# Altium PCB pcb.PcbDoc (part 2 of 2)
Units mil, origin at the board's own origin, x right, y up, seen from the top; angles counter-clockwise.
Board outline 2362.2 x 2507.87 mil, 4 copper layers (Top Layer, Internal Plane 1, MidLayer1, Bottom Layer); 87 components, 150 nets, 729 pads, 361 vias.
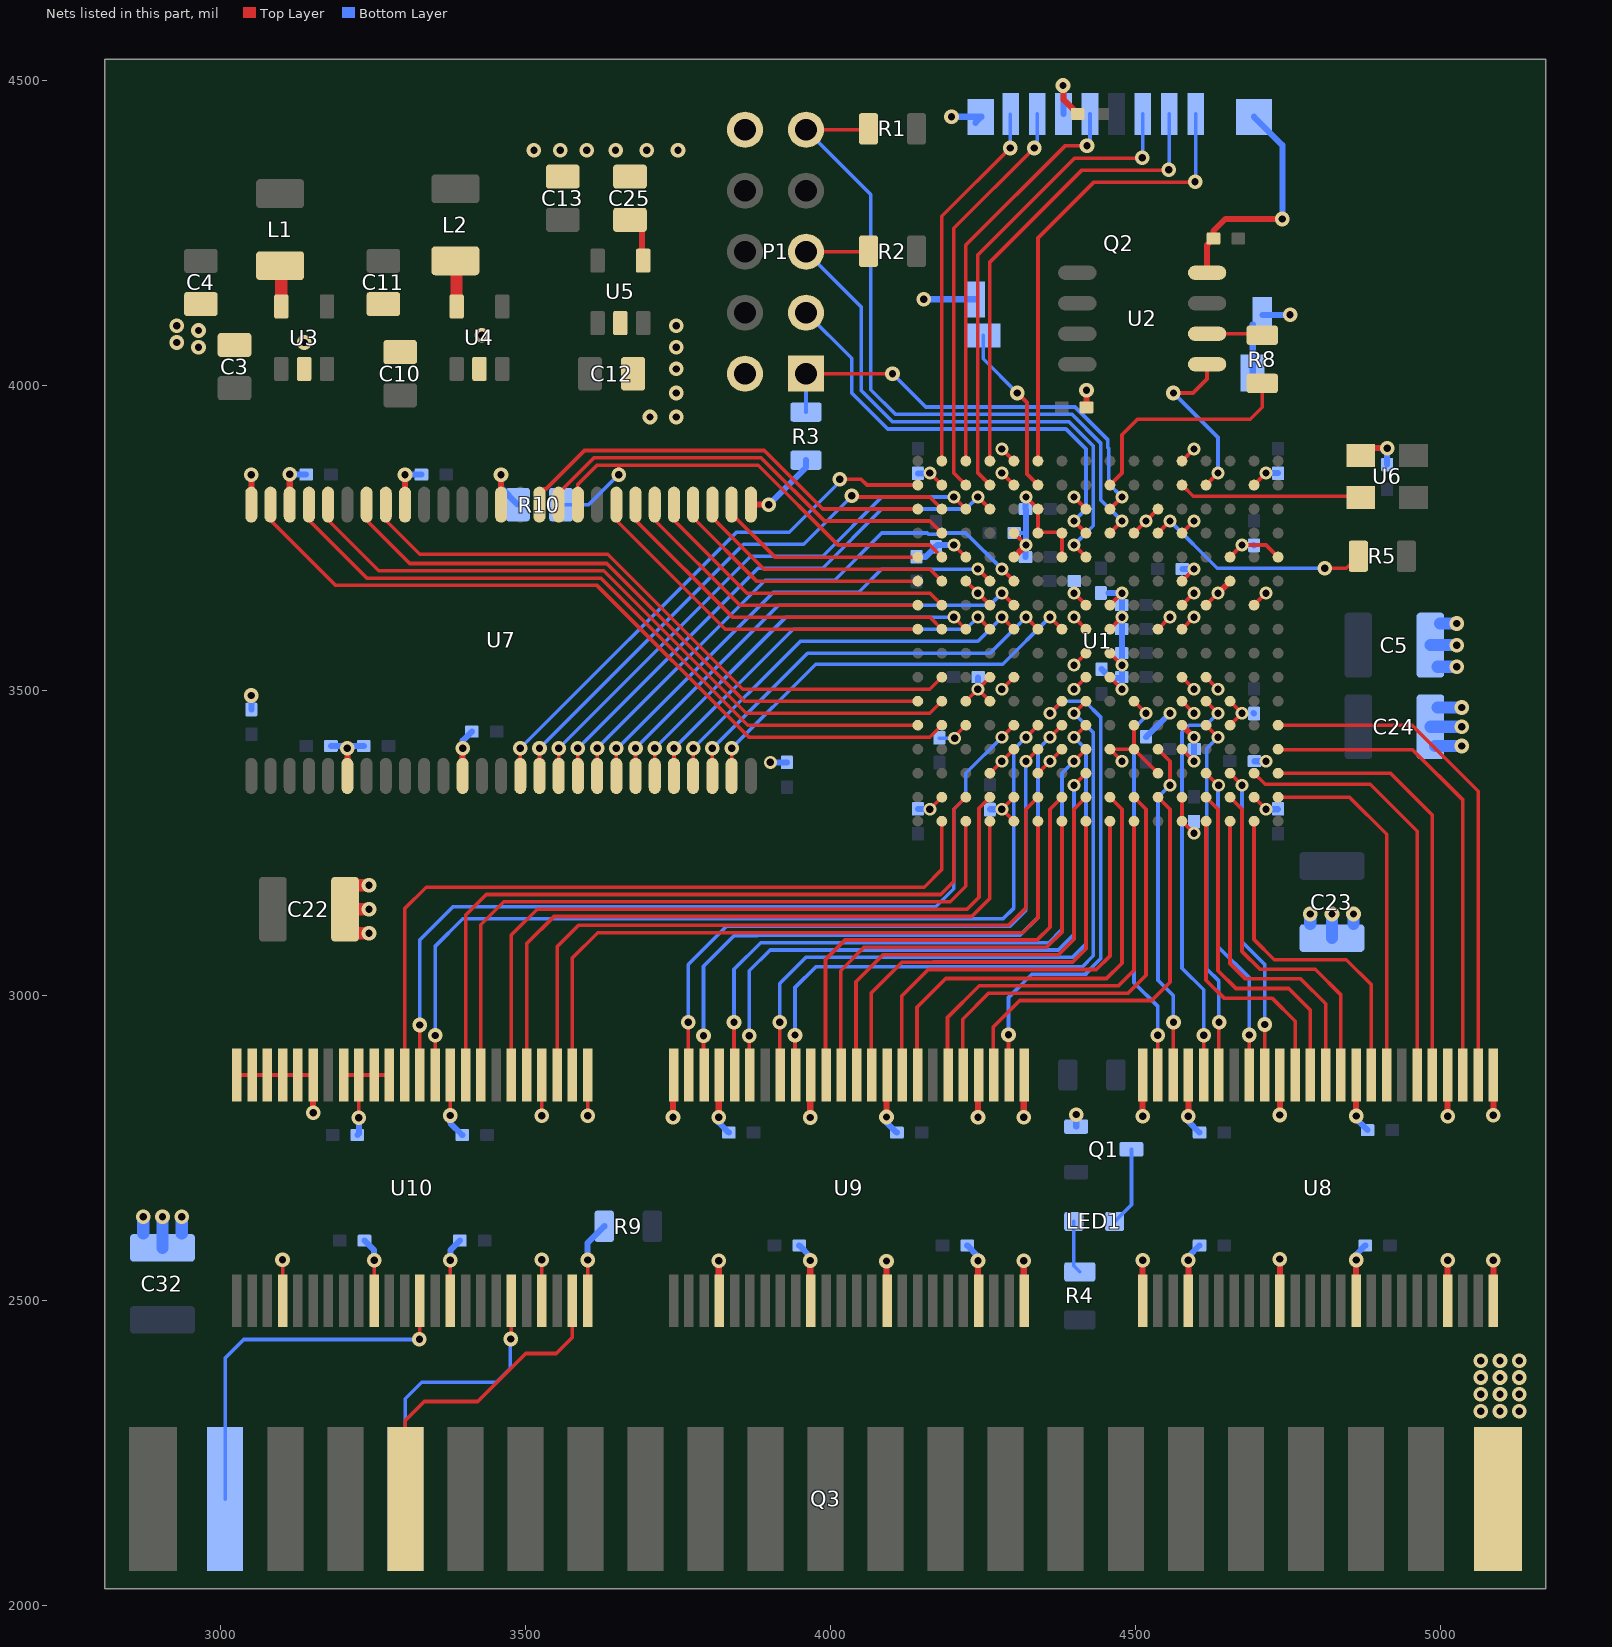
[diagram p4: the nets of this part, all layers, seen from the top]

## Via types
v1: diameter 24, hole 12, Top Layer to Bottom Layer, 242 vias
v2: diameter 21, hole 12, Top Layer to Bottom Layer, 116 vias
v3: diameter 22, hole 12, Top Layer to Bottom Layer, 2 vias
v4: diameter 23, hole 12, Top Layer to Bottom Layer, 1 vias

## Nets (pads, with @x,y where several pads share a name; then routed paths per layer and width w, separated by ;. In a path a pad name is that pad's centre, name@x,y a point inside that pad or via, vN(x,y) a via of type N, cw(c..) or ccw(c..) an arc to the next point about the centre after c; other vN are vias at no path point) (continued)
DQ11: U1.R10 U7.47 | length 1060.1
  Top Layer w6: U7.47@3271.65,3805.12 3271.65,3779.53 3327.34,3723.84 3635.73,3723.84 3857.01,3502.56 4163.62,3502.56 U1.R10@4183.31,3522.24
DQ12: U1.T11 U7.48 | length 1052.2
  Top Layer w6: U7.48@3240.16,3805.12 3240.16,3779.53 3311.02,3708.66 3633.94,3708.66 3859.73,3482.87 U1.T11@4143.94,3482.87
DQ13: U1.R11 U7.50 | length 1170.9
  Top Layer w6: U7.50@3177.17,3805.12 3177.17,3779.53 3260.03,3696.66 3628.97,3696.66 3862.44,3463.19 4163.62,3463.19 U1.R11@4183.31,3482.87
DQ14: U1.T12 U7.51 | length 1163
  Top Layer w6: U7.51@3145.67,3805.12 3145.67,3779.53 3240.54,3684.66 3624,3684.66 3865.16,3443.5 U1.T12@4143.94,3443.5
DQ15: U1.R12 U7.53 | length 1281.7
  Top Layer w6: U7.53@3082.68,3805.12 3082.68,3779.53 3189.54,3672.66 3618.11,3672.66 3866.95,3423.82 4163.62,3423.82 U1.R12@4183.31,3443.5
FA0: U1.J15 U9.36 | length 779.9
  Top Layer w6: U9.36@4042.5,2870.04 4042.5,3022.82 4086.61,3066.93 4164.13,3066.93 4164.51,3067.31 4374.39,3067.31 4399.84,3092.76 4399.84,3305.71 U1.J15@4419.53,3325.39
FA1: U1.H16 U9.33 | length 718.8
  Top Layer w6: U9.33@4117.5,2870.04 4117.5,2999.39 4161.04,3042.93 4436.63,3042.93 4458.9,3065.2 U1.H16@4458.9,3286.02
FA2: U1.G16 U9.30 | length 676.4
  Top Layer w6: U9.30@4192.5,2870.04 4192.5,2964.15 4244.47,3016.13 4472.82,3016.13 4498.27,3041.58 U1.G16@4498.27,3286.02
FA3: U1.F15 U9.27 | length 710.4
  Top Layer w6: U9.27@4267.5,2870.04 4267.5,2948.6 4311.02,2992.13 4527.56,2992.13 4557.32,3021.89 4557.32,3305.71 U1.F15@4537.64,3325.39
FA4: U1.G11 U8.47 | length 645.4
  Top Layer w6: U1.G11@4498.27,3482.87 v2(4517.95,3463.19) ; U8.47@4537.5,2870.04 v1(4537.5,2935.14)
  Bottom Layer w6: v2(4517.95,3463.19) 4517.95,3458.01 4498.27,3438.32 4498.27,3021.42 4537.5,2982.19 v1(4537.5,2935.14)
FA5: U1.D11 U8.44 | length 676.3
  Top Layer w6: U8.44@4612.5,2870.04 v1(4612.5,2935.33) ; U1.D11@4616.38,3482.87 v2(4636.06,3463.19)
  Bottom Layer w6: v1(4612.5,2935.33) 4612.5,3009.55 4577.01,3045.04 4577.01,3431.71 4588.62,3443.32 4616.19,3443.32 v2(4636.06,3463.19)
FA6: U1.D14 U8.41 | length 524.2
  Top Layer w6: U1.D14@4616.38,3364.76 v2@4636.06,3345.08 ; U8.41@4687.5,2870.04 v1(4687.5,2935.53)
  Bottom Layer w6: v2@4636.06,3345.08 4636.06,3080.47 4687.5,3029.04 v1(4687.5,2935.53)
  other v2: 4637.06,3345.08
FA7: U1.D16 U8.38 | length 522.6
  Top Layer w6: U1.D16@4616.38,3286.02 4616.38,3025.35 4645.67,2996.06 4724.41,2996.06 4762.5,2957.97 U8.38@4762.5,2870.04
FA8: U1.C16 U8.36 | length 534
  Top Layer w6: U1.C16@4655.75,3286.02 4655.75,3052.91 4681.1,3027.56 4771.65,3027.56 4812.5,2986.71 U8.36@4812.5,2870.04
FA9: U1.B16 U8.33 | length 564.9
  Top Layer w6: U1.B16@4695.12,3286.02 4695.12,3092.28 4728.35,3059.06 4846.46,3059.06 4887.5,3018.01 U8.33@4887.5,2870.04
FA10: U1.B14 U8.30 | length 706.5
  Top Layer w6: U1.B14@4695.12,3364.76 4713.43,3346.46 4885.83,3346.46 4962.5,3269.78 U8.30@4962.5,2870.04
FA11: U1.A13 U8.27 | length 788.3
  Top Layer w6: U1.A13@4734.49,3404.13 4735.35,3403.28 4954.99,3403.28 5037.5,3320.77 U8.27@5037.5,2870.04
FA12: U1.A12 U8.26 | length 838
  Top Layer w6: U1.A12@4734.49,3443.5 4954.13,3443.5 5062.5,3335.14 U8.26@5062.5,2870.04
FA13: U1.A14 U8.29 | length 707.4
  Top Layer w6: U1.A14@4734.49,3364.76 4918.7,3364.76 4987.5,3295.96 U8.29@4987.5,2870.04
FA14: U1.A15 U8.32 | length 597.8
  Top Layer w6: U1.A15@4734.49,3325.39 4851.77,3325.39 4912.5,3264.67 U8.32@4912.5,2870.04
FA15: U1.C15 U8.35 | length 583.7
  Top Layer w6: U1.C15@4655.75,3325.39 4675.43,3305.71 4675.43,3072.6 4704.72,3043.31 4795.28,3043.31 4837.5,3001.08 U8.35@4837.5,2870.04
FBA0: U1.D15 U8.37 | length 577
  Top Layer w6: U1.D15@4616.38,3325.39 4636.06,3305.71 4636.06,3041.1 4665.35,3011.81 4751.97,3011.81 4787.5,2976.28 U8.37@4787.5,2870.04
FBA1: U1.C14 U8.40 | length 518.2
  Top Layer w6: U1.C14@4655.75,3364.76 v2(4675.43,3345.08) ; U8.40@4712.5,2870.04 v1@4712.5,2952.66
  Bottom Layer w6: v2(4675.43,3345.08) 4675.43,3088.35 4712.5,3051.28 4712.5,2952.85 v1(4712.6,2952.76)
FBA2: U1.D12 U8.43 | length 597.4
  Top Layer w6: U1.D12@4616.38,3443.5 v2(4636.06,3423.82) ; U8.43@4637.5,2870.04 4637.5,2956.4 v1(4637.8,2956.69)
  Bottom Layer w6: v2(4636.06,3423.82) 4617.5,3405.26 4617.5,3043.91 4637.5,3023.92 v1@4637.5,2956.99
FBA3: U1.F13 U8.46 | length 559.7
  Top Layer w6: U1.F13@4537.64,3404.13 4557.32,3384.45 v2(4557.32,3345.08) ; U8.46@4562.5,2870.04 v1@4562.5,2956.2
  Bottom Layer w6: v2(4557.32,3345.08) 4537.64,3325.39 4537.64,3025.35 4562.5,3000.49 v1@4562.5,2957.18
  other v1: 4562.99,2956.69
FBA4: U1.K11 U9.26 | length 831.4
  Top Layer w6: U9.26@4292.5,2870.04 v1(4292.5,2935.85) ; v2(4360.47,3463.19) U1.K11@4380.16,3482.87
  Bottom Layer w6: v1(4292.5,2935.85) 4292.5,2997.22 4330.52,3035.24 4419.53,3035.24 4419.53,3036.42 4443.53,3060.42 4443.53,3456.92 4417.58,3482.87 4380.16,3482.87 v2(4360.47,3463.19)
FBA5: U1.G15 U9.29 | length 721.7
  Top Layer w6: U9.29@4217.5,2870.04 4217.5,2961.59 4259.84,3003.94 4305.86,3003.94 4306.05,3004.13 4488.38,3004.13 4517.95,3033.7 4517.95,3305.71 U1.G15@4498.27,3325.39
FBA6: U1.H15 U9.32 | length 757.2
  Top Layer w6: U9.32@4142.5,2870.04 4142.5,2981.08 4189.54,3028.13 4453.32,3028.13 4478.58,3053.39 4478.58,3305.71 U1.H15@4458.9,3325.39
FBA7: U1.J16 U9.35 | length 725.5
  Top Layer w6: U9.35@4067.5,2870.04 4067.5,3004.51 4117.92,3054.93 4169.1,3054.93 4169.48,3055.31 4397.83,3055.31 4419.53,3077.01 U1.J16@4419.53,3286.02
FCART: U1.L15 U10.27 | length 1194.7
  Top Layer w6: U10.27@3552.5,2870.04 3552.5,3080.06 3587.75,3115.31 4292.47,3115.31 4321.1,3143.94 4321.1,3305.71 U1.L15@4340.79,3325.39
FCIC1: U1.R16 U10.37 | length 1259.1
  Top Layer w6: U10.37@3302.5,2870.04 3302.5,3142.59 3337.83,3177.92 4154.3,3177.92 4183.31,3206.93 U1.R16@4183.31,3286.02
FCIC2: U1.N16 U10.29 | length 1131.9
  Top Layer w6: U10.29@3502.5,2870.04 3502.5,3085.18 3547.24,3129.92 4232.28,3129.92 4262.05,3159.69 4262.05,3246.65 U1.N16@4262.05,3286.02
FCIC6: U1.P16 U10.32 | length 1174.3
  Top Layer w6: U10.32@3427.5,2870.04 3427.5,3116.48 3464.95,3153.92 4197.23,3153.92 4222.68,3179.37 U1.P16@4222.68,3286.02
FCIC7: U1.P15 U10.33 | length 1231.6
  Top Layer w6: U10.33@3402.5,2870.04 3402.5,3131.98 3436.44,3165.92 4181.67,3165.92 4202.99,3187.24 4202.99,3305.71 U1.P15@4222.68,3325.39
FCPUCLK: U1.L12 U10.35 | length 1501.7
  Top Layer w6: U10.35@3352.5,2870.04 v1(3352.5,2934.9) ; v2(4321.1,3423.82) U1.L12@4340.79,3443.5
  Bottom Layer w6: v1(3352.5,2934.9) 3352.5,3080.85 3397.83,3126.17 4283.65,3126.17 4301.42,3143.94 4301.42,3404.13 v2(4321.1,3423.82)
FD0: U1.K15 U9.38 | length 800.4
  Top Layer w6: U9.38@3992.5,2870.04 3992.5,3059.43 4024.38,3091.31 4339.34,3091.31 4360.47,3112.44 4360.47,3305.71 U1.K15@4380.16,3325.39
FD1: U1.J12 U9.41 | length 1053.4
  Top Layer w6: U9.41@3917.5,2870.04 v1@3917.5,2956.52 ; v2(4399.84,3423.82) U1.J12@4419.53,3443.5
  Bottom Layer w6: v1@3917.5,2956.87 3917.5,3019.86 3960.63,3062.99 4397.64,3062.99 4419.53,3084.88 4419.53,3404.13 v2(4399.84,3423.82)
  other v1: 3917.32,2956.69
FD2: U1.J13 U9.44 | length 1049.8
  Top Layer w6: U9.44@3842.5,2870.04 v1(3842.52,2956.69) ; v2(4399.84,3384.45) U1.J13@4419.53,3404.13
  Bottom Layer w6: v1(3842.52,2956.69) 3842.52,3043.27 ; 3842.5,3043.29 3886.2,3086.99 4358.65,3086.99 4380.16,3108.5 4380.16,3364.76 v2(4399.84,3384.45)
FD3: U1.L13 U9.47 | length 1043.3
  Top Layer w6: U9.47@3767.5,2870.04 v1@3767.5,2956.48 ; v2(4321.1,3384.45) U1.L13@4340.79,3404.13
  Bottom Layer w6: v1@3767.5,2956.91 3767.5,3050.96 3830.71,3114.17 4295.28,3114.17 4321.1,3140 v2(4321.1,3384.45)
  other v1: 3767.72,2956.69
FD4: U1.K16 U9.37 | length 741.5
  Top Layer w6: U9.37@4017.5,2870.04 4017.5,3041.12 4055.69,3079.31 4354.9,3079.31 4380.16,3104.57 4380.16,3246.65 U1.K16@4380.16,3286.02
FD5: U1.J11 U9.40 | length 1092.7
  Top Layer w6: U9.40@3942.5,2870.04 v1(3942.5,2935.45) ; v2(4399.84,3463.19) U1.J11@4419.53,3482.87
  Bottom Layer w6: v1(3942.5,2935.45) 3942.5,3013.37 3976.38,3047.24 4413.39,3047.24 4431.53,3065.39 4431.53,3431.5 v2(4399.84,3463.19)
FD6: U1.J14 U9.43 | length 1000.1
  Top Layer w6: U9.43@3867.5,2870.04 v1(3867.5,2934.43) ; v2(4399.84,3345.08) U1.J14@4419.53,3364.76
  Bottom Layer w6: v1(3867.5,2934.43) 3867.5,3040.73 3901.76,3074.99 4374.2,3074.99 4399.84,3100.63 v2(4399.84,3345.08)
FD7: U1.K12 U9.46 | length 1091.3
  Top Layer w6: U9.46@3792.5,2870.04 v1(3792.5,2934.23) ; v2(4360.47,3423.82) U1.K12@4380.16,3443.5
  Bottom Layer w6: v1(3792.5,2934.23) 3792.5,3048.41 3842.52,3098.43 3880.67,3098.43 3881.23,3098.99 4311.59,3098.99 4340.79,3128.19 4340.79,3404.13 v2(4360.47,3423.82)
FLASHCE: U1.D2 U2.1 | length 278.2
  Top Layer w6: v1(4562.94,3988.15) 4595.18,3988.15 4618.11,4011.08 U2.1@4618.11,4035.24 ; U1.D2@4616.38,3837.21 v2(4636.06,3856.89)
  Bottom Layer w6: v1(4562.94,3988.15) 4636.06,3915.03 v2(4636.06,3856.89)
FLASHDATA: R8.2 U1.H2 | length 378.6
  Top Layer w6: U1.H2@4458.9,3837.21 4478.58,3856.89 4478.58,3919.53 4503.94,3944.88 4688.98,3944.88 4708.66,3964.57 R8.2@4708.66,4003.94
FRD: U1.N15 U10.30 | length 1193.1
  Top Layer w6: U10.30@3477.5,2870.04 3477.5,3099.55 3519.87,3141.92 4224.6,3141.92 4244.09,3161.42 4244.09,3307.44 U1.N15@4262.05,3325.39
FRESET: U1.M12 U10.36 | length 1440.4
  Top Layer w6: U10.36@3327.5,2870.04 v1(3327.5,2952.03) ; v2(4281.73,3423.82) U1.M12@4301.42,3443.5
  Bottom Layer w6: v1(3327.5,2952.03) 3327.5,3091.28 3381.89,3145.67 4173.23,3145.67 4202.99,3175.43 4202.99,3305.71 4222.68,3325.39 4222.68,3364.76 v2(4281.73,3423.82)
FWR: U1.L16 U10.26 | length 1140.4
  Top Layer w6: U10.26@3577.5,2870.04 3577.5,3061.75 3619.06,3103.31 4315.91,3103.31 4340.79,3128.19 4340.79,3246.65 U1.L16@4340.79,3286.02
GND: C1.1 C2.1 C3.1 C4.1 C5.2 C6.1 C7.1 C8.1 C9.1 C10.1 C11.1 C12.1 C13.1 C14.1 C15.1 C16.1 C17.1 C18.1 C19.1 C20.1 C21.1 C22.2 C23.2 C24.2 C25.1 C26.1 C27.1 C28.1 C29.1 C30.1 C31.1 C32.2 C34.1 C35.1 C36.1 C37.1 C38.1 C39.1 C40.1 C41.1 C42.1 C45.1 C46.1 C47.1 C48.1 C49.1 C50.1 C51.1 C52.1 C53.1 C54.1 C55.1 C56.1 C57.1 C58.1 C59.1 C60.1 C61.1 C62.1 C63.1 C64.1 P1.2 P1.10 Q1.2 Q2.6 Q2.CD2 Q2.GND Q3.5 Q3.36 R3.2 R9.1 R10.1 U1.A5 U1.B2 U1.B7 U1.B15 U1.C5 U1.C6 U1.C11 U1.C12 U1.D7 U1.D10 U1.E1 U1.E4 U1.E6 U1.E7 U1.E8 U1.E10 U1.E11 U1.E12 U1.E13 U1.E15 U1.E16 U1.F3 U1.F8 U1.F14 U1.G4 U1.G12 U1.G13 U1.H7 U1.H8 U1.H9 U1.H10 U1.H13 U1.J3 U1.J7 U1.J8 U1.J9 U1.J10 U1.K4 U1.K5 U1.K13 U1.L3 U1.L4 U1.L14 U1.M1 U1.M2 U1.M4 U1.M5 U1.M10 U1.M13 U1.M15 U1.M16 U1.N7 U1.N10 U1.N11 U1.N14 U1.P5 U1.P6 U1.P11 U1.P12 U1.R2 U1.R15 U2.4 U3.2 U4.2 U5.2 U6.2 U7.6 U7.12 U7.28 U7.41 U7.46 U7.52 U7.54 U8.1 U8.4 U8.10 U8.15 U8.21 U8.24 U8.25 U8.28 U8.34 U8.39 U8.45 U8.48 U9.4 U9.10 U9.15 U9.21 U9.24 U9.25 U9.28 U9.34 U9.39 U9.45 U9.48 U10.4 U10.10 U10.15 U10.21 U10.24 U10.25 U10.28 U10.34 U10.38 U10.39 U10.40 U10.41 U10.43 U10.44 U10.45 U10.46 U10.47 U10.48 | length 7422.5
  Top Layer w6: U10.48@3027.5,2870.04 U10.47@3052.5,2870.04 U10.46@3077.5,2870.04 U10.45@3102.5,2870.04 U10.44@3127.5,2870.04 U10.43@3152.5,2870.04 ; v1(3102.36,2566.93) 3102.5,2566.79 U10.4@3102.5,2499.96 ; U10.41@3202.5,2870.04 U10.40@3227.5,2870.04 ; v1(3227.5,2800.06) U10.40@3227.5,2870.04 ; v1@3251.97,2566.93 v1(3252.5,2566.4) U10.10@3252.5,2499.96 ; U10.38@3277.5,2870.04 U10.39@3252.5,2870.04 U10.40@3227.5,2870.04 ; U10.15@3377.5,2499.96 v1(3377.5,2566.48) v1@3377.95,2566.93 ; v1(3377.5,2803.6) U10.34@3377.5,2870.04 ; U10.21@3527.5,2499.96 v1(3527.5,2566.87) ; v1(3527.5,2803.21) U10.28@3527.5,2870.04 ; U10.24@3602.5,2499.96 v1(3602.5,2566.79) ; v1(3602.5,2803.29) U10.25@3602.5,2870.04 ; v2(4163.62,3305.71) U1.R15@4183.31,3325.39 ; v2(4163.62,3856.89) U1.R2@4183.31,3837.21 ; v2@4202.99,3423.82 U1.P12@4222.68,3443.5 ; v2(4202.99,3738.78) U1.P5@4222.68,3719.1 ; U1.P11@4222.68,3482.87 v2(4242.36,3502.56) ; U1.P6@4222.68,3679.73 v2(4242.36,3660.04) U1.N7@4262.05,3640.36 ; U1.N14@4262.05,3364.76 v2(4281.73,3384.45) U1.M13@4301.42,3404.13 ; U1.N11@4262.05,3482.87 v2(4242.36,3502.56) ; U1.N10@4262.05,3522.24 v2(4242.36,3502.56) ; v2(4281.73,3502.56) U1.M10@4301.42,3522.24 ; v2(4281.73,3856.89) U1.M2@4301.42,3837.21 ; v2(4281.73,3896.26) U1.M1@4301.42,3876.58 ; U1.M16@4301.42,3286.02 v2(4281.73,3305.71) U1.M15@4301.42,3325.39 ; U1.M4@4301.42,3758.47 v2(4321.1,3738.78) ; v2(4321.1,3817.52) U1.L3@4340.79,3797.84 U1.L4@4340.79,3758.47 4341.97,3759.65 U1.K4@4378.97,3759.65 ; U1.L14@4340.79,3364.76 v2(4360.47,3384.45) U1.K13@4380.16,3404.13 ; U1.K5@4380.16,3719.1 U1.K4@4380.16,3758.47 ; v2(4399.84,3502.56) U1.J10@4419.53,3522.24 ; v2(4399.84,3541.93) U1.J9@4419.53,3561.61 ; v2(4399.84,3620.67) U1.J8@4419.53,3600.98 ; v2(4399.84,3660.04) U1.J7@4419.53,3640.36 ; v2(4399.84,3817.52) U1.J3@4419.53,3797.84 ; U1.H10@4458.9,3522.24 v2(4478.58,3502.56) ; U1.H9@4458.9,3561.61 v2(4478.58,3541.93) ; U1.H8@4458.9,3600.98 v2(4478.58,3620.67) ; U1.H7@4458.9,3640.36 v2(4478.58,3660.04) ; v2(4478.58,3384.45) U1.H13@4458.9,3404.13 U1.G13@4498.27,3404.13 ; U1.G12@4498.27,3443.5 U1.G13@4498.27,3404.13 ; U1.G4@4498.27,3758.47 v2(4517.95,3778.15) U1.F3@4537.64,3797.84 ; U1.F14@4537.64,3364.76 U1.G13@4498.27,3404.13 ; U1.F8@4537.64,3600.98 v2(4557.32,3620.67) ; U1.E15@4577.01,3325.39 U1.E16@4577.01,3286.02 v2(4596.69,3266.34) ; U1.E13@4577.01,3404.13 v2(4596.69,3384.45) ; U1.E11@4577.01,3482.87 v2(4596.69,3463.19) ; U1.E10@4577.01,3522.24 v2(4596.69,3502.56) ; U1.E8@4577.01,3600.98 v2(4596.69,3620.67) ; U1.E7@4577.01,3640.36 v2(4596.69,3660.04) ; U1.E6@4577.01,3679.73 v2(4596.69,3699.41) ; U1.E4@4577.01,3758.47 v2(4596.69,3778.15) ; U1.E1@4577.01,3876.58 v2(4596.69,3896.26) ; U1.D10@4616.38,3522.24 v2(4636.06,3502.56) ; U1.D7@4616.38,3640.36 v2(4636.06,3660.04) ; U1.C12@4655.75,3443.5 v2(4675.43,3463.19) U1.C11@4655.75,3482.87 ; U1.C5@4655.75,3719.1 v2(4675.43,3738.78) 4714.8,3738.78 U1.A5@4734.49,3719.1 ; U1.B15@4695.12,3325.39 v2(4714.8,3305.71) ; U1.B2@4695.12,3837.21 v2(4714.8,3856.89) ; U1.B7@4696.84,3637.79 4696.84,3638.63 U1.B7@4695.12,3640.36 v2(4714.8,3660.04)
  Top Layer w10: U7.54@3051.18,3805.12 v1(3051.18,3853.96) ; U7.52@3114.17,3805.12 v1(3114.17,3854.86) ; v1(3152.5,2808.13) U10.43@3152.5,2870.04 ; U7.6@3208.66,3360.24 v1(3208.66,3405.51) ; U7.46@3303.15,3805.12 v1(3303.15,3854.33) ; U7.12@3397.64,3360.24 v1(3397.64,3405.51) ; U7.41@3460.63,3805.12 v1(3460.63,3854.33) ; v1(3742.5,2800.81) U9.48@3742.5,2870.04 ; U9.4@3817.5,2499.96 v1(3817.5,2565.53) ; v1(3817.5,2800.61) U9.45@3817.5,2870.04 ; U7.28@3870.08,3805.12 v1(3899.61,3805.12) ; U9.10@3967.5,2499.96 v1(3967.5,2565.93) ; v1(3967.5,2800.22) U9.39@3967.5,2870.04 ; U9.15@4092.5,2499.96 v1(4092.5,2564.94) ; v1(4092.5,2801.2) U9.34@4092.5,2870.04 ; U9.21@4242.5,2499.96 v1(4242.5,2565.33) ; v1(4242.5,2800.81) U9.28@4242.5,2870.04 ; U1.M5@4301.42,3719.1 v2(4321.1,3738.78) ; U9.24@4317.5,2499.96 v1(4317.5,2565.53) ; v1(4317.5,2800.61) U9.25@4317.5,2870.04 ; v1@4382.87,4491.14 4382.87,4468.9 C52.1@4405.91,4445.87 ; C2.1@4420.48,3964.65 v1(4420.48,3992.57) v1@4420.7,3992.78 ; U8.1@4512.5,2499.96 v1(4512.5,2566.24) ; v1(4512.5,2802.46) U8.48@4512.5,2870.04 ; U1.E12@4577.01,3443.5 v2(4596.69,3423.82) ; U8.4@4587.5,2499.96 v1(4587.5,2566.04) ; v1(4587.5,2802.26) U8.45@4587.5,2870.04 ; U2.4@4618.11,4185.24 4618.11,4230.77 C1.1@4628.63,4241.29 4628.63,4253.8 4648.21,4273.38 v1(4741.59,4273.38) ; v2(4636.06,3660.04) U1.C6@4655.75,3679.73 ; U8.10@4737.5,2499.96 v1(4737.5,2568.21) ; v1(4737.5,2804.43) U8.39@4737.5,2870.04 ; U8.15@4862.5,2499.96 v1(4862.5,2566.63) ; v1(4862.5,2802.85) U8.34@4862.5,2870.04 ; U6.2@4870.08,3885.83 4881.89,3897.64 v1(4913.39,3897.64) ; U8.21@5012.5,2499.96 v1(5012.5,2566.24) ; v1(5012.5,2802.46) U8.28@5012.5,2870.04 ; U8.24@5087.5,2499.96 v1(5087.5,2566.04) ; v1(5087.5,2804.04) U8.25@5087.5,2870.04
  Top Layer w20: C22.2@3204.73,3141.73 v1(3244.09,3141.73) ; 3228.35,3102.36 v1(3244.09,3102.36) ; 3228.35,3181.1 v1(3244.09,3181.1)
  Bottom Layer w6: C14.1@4179.21,3422.13 v2(4204.21,3422.13) ; v2(4242.36,3660.04) v2@4243.49,3661.17 ; C9.1@4302.01,3758.46 4321.1,3758.46 ; C38.1@4476.41,3520.66 C38.1@4477.99,3522.24
  Bottom Layer w10: C48.1@3051.18,3469.09 v1(3051.18,3492.13) ; v1@3114.7,3854.33 C51.1@3141.14,3854.33 ; C49.1@3181.69,3409.45 v1@3204.72,3409.45 ; v1@3212.6,3409.45 C47.1@3235.63,3409.45 ; C59.1@3225,2771.65 3227.5,2774.15 v1(3227.5,2800.06) ; C62.1@3236.81,2598.43 3252.5,2582.74 v1(3252.5,2566.4) ; v1@3303.15,3854.33 C50.1@3330.12,3854.33 ; v1(3377.5,2566.48) 3377.5,2582.82 C63.1@3393.11,2598.43 ; v1(3377.5,2803.6) 3377.5,2791.2 C53.1@3397.05,2771.65 ; v1(3397.64,3405.51) 3397.64,3417.91 C46.1@3412.8,3433.07 ; v1(3460.63,3854.33) 3460.63,3832.68 R10.1@3488.19,3805.12 ; v1(3602.5,2566.79) 3602.5,2594.63 R9.1@3629.92,2622.05 ; v1(3817.5,2800.61) 3817.5,2792.15 C61.1@3834.06,2775.59 ; v1(3899.61,3805.12) 3960.63,3866.14 R3.2@3960.63,3877.95 ; v2(3902.17,3382.48) C45.1@3929.13,3382.48 ; C64.1@3949.41,2590.55 3967.5,2572.46 v1(3967.5,2565.93) ; v1(4092.5,2801.2) 4092.5,2792.74 C60.1@4109.65,2775.59 ; C17.1@4143.62,3719.69 4156.8,3719.69 C16.1@4173.31,3736.19 4175.9,3738.78 v2(4202.99,3738.78) ; C29.1@4143.94,3306.3 v2@4163.03,3306.3 ; C27.1@4143.94,3856.3 v2@4163.03,3856.3 ; v1@4153.13,4142.26 v1(4153.66,4141.73) Q2.GND@4238.19,4141.73 ; v1(4199.16,4440.94) 4248.03,4440.94 Q2.GND@4238.19,4431.1 ; C54.1@4225,2590.55 4242.5,2573.05 v1(4242.5,2565.33) ; v2(4242.36,3502.56) C18.1@4242.36,3521.65 ; C19.1@4262.64,3305.71 v2(4281.73,3305.71) v2@4281.14,3305.12 ; C7.1@4320.51,3719.1 v2@4320.51,3738.19 ; v2@4320.51,3816.93 C28.1@4320.51,3797.83 4321.1,3797.24 4321.1,3758.46 v2(4321.1,3738.78) ; v1(4381.89,4492.13) 4382.87,4491.14 Q2.6@4382.87,4445.87 ; Q1.2@4403.54,2785.43 v1(4403.54,2805.12) ; C41.1@4445.2,3535.33 4459.86,3520.66 C38.1@4476.41,3520.66 ; 4456.92,3660.04 v2(4478.58,3660.04) v2(4478.58,3620.67) v2(4478.58,3541.93) v2(4478.58,3502.56) ; C20.1@4517.95,3424.41 4518.54,3424.41 v2(4557.32,3463.19) ; C39.1@4577.6,3699.41 v2(4596.69,3699.41) ; v1(4587.5,2566.04) 4587.5,2572.34 C56.1@4605.71,2590.55 ; v1(4587.5,2802.26) 4587.5,2793.8 C57.1@4605.71,2775.59 ; v2(4596.69,3384.45) v2(4596.69,3423.82) ; Q2.CD2@4692.91,4020.67 4692.91,4100.39 ; C26.1@4694.53,3463.19 C26.1@4695.12,3462.6 ; C21.1@4694.53,3738.78 C21.1@4695.12,3738.19 ; Q2.GND@4694.88,4440.94 4741.59,4394.23 v1(4741.59,4273.38) ; C8.1@4695.71,3384.45 v2(4714.8,3384.45) ; Q2.GND@4708.66,4116.14 v1(4754.17,4116.14) v1@4755.93,4114.38 ; v2(4714.8,3305.71) C30.1@4733.9,3305.71 ; v2(4714.8,3856.89) C31.1@4733.9,3856.89 ; v1(4862.5,2566.63) 4862.5,2575.69 C58.1@4877.36,2590.55 ; v1(4862.5,2802.85) 4862.5,2798.33 C55.1@4881.3,2779.53 ; C34.1@4913.39,3870.67 v1(4913.39,3897.64)
  Bottom Layer w20: 2874.02,2610.24 v1(2874.02,2637.8) ; C32.2@2905.51,2586.61 v1(2905.51,2637.8) ; 2937.01,2610.24 v1(2937.01,2637.8) ; 4787.4,3118.11 v1(4787.4,3133.86) ; C23.2@4822.83,3094.49 v1(4822.83,3133.86) ; 4858.27,3118.11 v1(4858.27,3133.86) ; C24.2@4984.25,3440.95 v1(5035.43,3440.95) ; C5.2@4984.25,3574.8 v1(5027.56,3574.8) ; C24.2@4992.13,3409.45 v1(5035.43,3409.45) ; C24.2@4996.06,3472.44 v1(5035.43,3472.44) ; C5.2@4996.06,3539.37 v1(5027.56,3539.37) ; C5.2@5000,3610.24 v1(5027.56,3610.24)
  other v1: 5066.93,2318.9 5098.43,2318.9 5129.92,2318.9 5066.93,2346.46 5098.43,2346.46 5129.92,2346.46 5066.93,2374.02 5098.43,2374.02 5129.92,2374.02 5066.93,2401.57 5098.43,2401.57 5129.92,2401.57 3704.72,3948.82 3748.03,3948.82 3748.03,3988.19 3748.03,4027.56 2964.57,4062.99 3748.03,4062.99 2929.13,4070.87 3137.8,4070.87 3429.13,4082.68 2964.57,4090.55 2929.13,4098.43 3748.03,4098.43 3514.52,4386.15 3557.82,4386.15 3601.13,4386.15 3648.38,4386.15 3699.56,4386.15 3750.74,4386.15
MA0: U1.N8 U7.23 | length 660.5
  Top Layer w6: U7.23@3744.09,3360.24 v1(3744.09,3405.51) ; v2(4242.36,3620.67) U1.N8@4262.05,3600.98
  Bottom Layer w6: v1(3744.09,3405.51) 3939.57,3600.98 4222.68,3600.98 v2(4242.36,3620.67)
MA1: U1.M8 U7.24 | length 668.4
  Top Layer w6: U7.24@3775.59,3360.24 v1(3775.59,3405.51) ; v2(4281.73,3620.67) U1.M8@4301.42,3600.98
  Bottom Layer w6: v1(3775.59,3405.51) 3951.38,3581.3 4242.36,3581.3 v2(4281.73,3620.67)
MA2: U1.L8 U7.25 | length 676.3
  Top Layer w6: U7.25@3807.09,3360.24 v1(3807.09,3405.51) ; v2(4321.1,3620.67) U1.L8@4340.79,3600.98
  Bottom Layer w6: v1(3807.09,3405.51) 3963.19,3561.61 4262.05,3561.61 v2(4321.1,3620.67)
MA3: U1.K8 U7.26 | length 684.1
  Top Layer w6: U7.26@3838.58,3360.24 v1(3838.58,3405.51) ; v2(4360.47,3620.67) U1.K8@4380.16,3600.98
  Bottom Layer w6: v1(3838.58,3405.51) 3976.38,3543.31 4283.11,3543.31 v2(4360.47,3620.67)
MA4: U1.T5 U7.29 | length 349.7
  Top Layer w6: U7.29@3838.58,3805.12 3838.58,3790.28 3909.77,3719.1 U1.T5@4143.94,3719.1
MA5: U1.R6 U7.30 | length 440.8
  Top Layer w6: U7.30@3807.09,3805.12 3807.09,3783.47 3891.14,3699.41 4163.62,3699.41 U1.R6@4183.31,3679.73
MA6: U1.T6 U7.31 | length 433
  Top Layer w6: U7.31@3775.59,3805.12 3775.59,3783.47 3879.33,3679.73 U1.T6@4143.94,3679.73
MA7: U1.R7 U7.32 | length 522.4
  Top Layer w6: U7.32@3744.09,3805.12 3744.09,3779.53 3863.58,3660.04 4163.62,3660.04 U1.R7@4183.31,3640.36
MA8: U1.T7 U7.33 | length 514.6
  Top Layer w6: U7.33@3712.6,3805.12 3712.6,3779.53 3851.77,3640.36 U1.T7@4143.94,3640.36
MA9: U1.R8 U7.34 | length 576.2
  Top Layer w6: U7.34@3681.1,3779.53 3839.96,3620.67 4163.62,3620.67 U1.R8@4183.31,3600.98
MA10: U1.P8 U7.22 | length 652.6
  Top Layer w6: U7.22@3712.6,3360.24 v1(3712.6,3405.51) ; v2(4202.99,3620.67) U1.P8@4222.68,3600.98
  Bottom Layer w6: v1(3712.6,3405.51) 3927.76,3620.67 v2(4202.99,3620.67)
MA11: U1.T8 U7.35 | length 568.3
  Top Layer w6: U7.35@3649.61,3779.53 3828.15,3600.98 U1.T8@4143.94,3600.98
MBA0: U1.N6 U7.20 | length 791
  Top Layer w6: U7.20@3649.61,3360.24 v1(3649.61,3405.51) ; v2(4242.36,3699.41) U1.N6@4262.05,3679.73
  Bottom Layer w6: v1(3649.61,3405.51) 3651.4,3405.51 3907.31,3661.42 ; 3909.43,3661.42 4046.89,3661.42 4084.88,3699.41 v2(4242.36,3699.41) v2@4238.47,3703.3
MBA1: U1.M7 U7.21 | length 779.2
  Top Layer w6: U7.21@3681.1,3360.24 v1(3681.1,3405.51) ; v2(4281.73,3660.04) U1.M7@4301.42,3640.36
  Bottom Layer w6: v1(3681.1,3405.51) 3915.95,3640.35 4262.05,3640.35 v2(4281.73,3660.04)
MCAS: U1.P3 U7.17 | length 891.6
  Top Layer w6: U7.17@3555.12,3360.24 v1(3555.12,3405.51) ; v2(4202.99,3817.52) U1.P3@4222.68,3797.84
  Bottom Layer w6: v1(3555.12,3405.51) 3870.08,3720.47 3987.83,3720.47 4084.88,3817.52 v2(4202.99,3817.52)
MCKE: R10.2 U1.R5 U7.37 | length 835.7
  Top Layer w6: U7.37@3586.61,3805.12 3586.61,3838.58 3617.73,3869.7 3653.54,3869.7 ; v1(3653.54,3854.33) 3653.54,3869.7 ; U1.R5@4183.31,3719.1 4163.62,3738.78 4013.19,3738.78 3882.27,3869.7 3653.54,3869.7
  Bottom Layer w6: R10.2@3559.05,3805.12 3604.33,3805.12 v1(3653.54,3854.33)
MCLK: U1.R4 U7.38 | length 722.1
  Top Layer w6: U7.38@3555.12,3805.12 3555.12,3824.06 3612.76,3881.7 3887.24,3881.7 3990.79,3778.15 4163.62,3778.15 U1.R4@4183.31,3758.47
MCS: U1.M6 U7.19 | length 909
  Top Layer w6: U7.19@3618.11,3360.24 v1(3618.11,3405.51) ; v2(4281.73,3699.41) U1.M6@4301.42,3679.73
  Bottom Layer w6: v1(3618.11,3405.51) 3893.7,3681.1 4007.52,3681.1 4084.88,3758.46 4158.95,3758.46 4160.89,3756.52 4185.72,3756.52 4187.67,3758.46 4222.68,3758.46 v2(4281.73,3699.41)
MLDQM: U1.T2 U7.15 | length 885.9
  Top Layer w6: U7.15@3492.13,3360.24 v1(3492.13,3405.51) ; v1(4015.74,3846.45) 4051.19,3846.45 4060.43,3837.21 U1.T2@4143.94,3837.21
  Bottom Layer w6: v1(3492.13,3405.51) 3846.46,3759.84 3933.07,3759.84 4015.74,3842.51 v1(4015.74,3846.45)
MRAS: U1.N3 U7.18 | length 899.5
  Top Layer w6: U7.18@3586.61,3360.24 v1(3586.61,3405.51) ; v2(4242.36,3817.52) U1.N3@4262.05,3797.84
  Bottom Layer w6: v1(3586.61,3405.51) 3881.89,3700.79 3987.83,3700.79 4084.88,3797.83 4222.68,3797.83 v2(4242.36,3817.52)
MUDQM: U1.T3 U7.39 | length 711.7
  Top Layer w6: U7.39@3523.62,3805.12 3523.62,3830.71 3534.38,3830.71 3597.37,3893.7 3892.21,3893.7 3988.07,3797.84 U1.T3@4143.94,3797.84
MWE: U1.R3 U7.16 | length 883
  Top Layer w6: U7.16@3523.62,3360.24 v1(3523.62,3405.51) ; v1@4036.81,3817.52 4163.62,3817.52 U1.R3@4183.31,3797.84
  Bottom Layer w6: v1(3523.62,3405.51) 3858.27,3740.16 3956.69,3740.16 v1@4035.43,3818.9
  other v1: 4035.43,3819.9
NetC25_2: C25.2 U5.4 | length 84.6
  Top Layer w10: C25.2@3672,4271.98 3691.68,4271.98 U5.4@3691.68,4207.02
NetLED1_A: LED1.A R4.1 | length 86.8
  Bottom Layer w6: LED1.A@4399.61,2629.92 4399.61,2557.09 R4.1@4409.45,2547.24
NetLED1_K: LED1.K Q1.3 | length 129.5
  Bottom Layer w6: LED1.K@4466.53,2629.92 4494.09,2657.48 Q1.3@4494.09,2748.03
NetR8_1: R8.1 U2.2 | length 91.6
  Top Layer w6: U2.2@4618.11,4085.24 4706.1,4085.24 R8.1@4708.66,4082.68
NetU1_E2: U1.E2 U6.3 | length 309.8
  Top Layer w6: U1.E2@4577.01,3837.21 4595.32,3818.9 4868.11,3818.9 U6.3@4875.98,3826.77
RD: Q3.23 U10.19 | length 467.6
  Top Layer w6: v1(3476.45,2437.08) 3477.5,2438.13 U10.19@3477.5,2499.96
  Bottom Layer w6: Q3.23@3303.7,2175 3303.7,2339.13 3330.71,2366.14 3452.76,2366.14 3475.83,2389.21 v1@3475.83,2436.46
RESET: Q3.26 U10.13 | length 624.5
  Top Layer w6: v1@3327.5,2437.74 U10.13@3327.5,2499.96
  Bottom Layer w6: Q3.26@3008.43,2175 3008.43,2406.06 3038.82,2436.46 v1@3326.22,2436.46
  Bottom Layer w10: v1@3326.22,2436.46 v1(3326.77,2437.01)
SDCD: Q2.CD1 U1.L2 | length 282.7
  Top Layer w6: v1(4307.09,3988.19) 4322.83,3972.44 4322.83,3855.16 U1.L2@4340.79,3837.21
  Bottom Layer w6: Q2.CD1@4250.98,4082.68 4250.98,4044.29 v1(4307.09,3988.19)
SDCLK: Q2.5 U1.P1 | length 667.4
  Top Layer w6: U1.P1@4222.68,3876.58 4222.68,3915.94 4222.68,4230.55 4385.83,4393.7 v1(4421.26,4393.7)
  Bottom Layer w6: v1@4426.18,4398.62 Q2.5@4426.18,4445.87
SDCMD: Q2.3 U1.N2 | length 792
  Top Layer w6: U1.N2@4262.05,3837.21 4242.36,3856.89 4242.36,4214.8 4400.26,4372.7 4510.5,4372.7 v1(4511.81,4374.02)
  Bottom Layer w6: v1@4512.8,4375 Q2.3@4512.8,4445.87
SDDAT0: Q2.7 U1.P2 | length 673.4
  Top Layer w6: U1.P2@4222.68,3837.21 4202.99,3856.89 4202.99,4258.11 v1(4334.65,4389.76)
  Bottom Layer w6: v1(4334.65,4389.76) 4339.57,4394.68 Q2.7@4339.57,4445.87
SDDAT1: Q2.8 U1.R1 | length 614.7
  Top Layer w6: U1.R1@4183.31,3876.58 4183.31,3915.94 4183.31,4277.79 v1(4295.28,4389.76)
  Bottom Layer w6: v1(4295.28,4389.76) Q2.8@4295.28,4444.88
SDDAT2: Q2.1 U1.L1 | length 773.3
  Top Layer w6: U1.L1@4340.79,3876.58 4340.79,4242.36 4431.76,4333.33 4597.11,4333.33 v1(4598.43,4334.65)
  Bottom Layer w6: v1(4598.43,4334.65) 4599.41,4335.63 Q2.1@4599.41,4445.87
SDDAT3: Q2.2 U1.N1 | length 774.1
  Top Layer w6: U1.N1@4262.05,3876.58 4262.05,3915.94 4262.05,4202.99 4412.07,4353.02 4553.8,4353.02 v1(4555.12,4354.33)
  Bottom Layer w6: v1(4555.12,4354.33) 4556.1,4355.31 Q2.2@4556.1,4445.87
STATUS: R5.1 U1.F4 | length 376.9
  Top Layer w6: U1.F4@4537.64,3758.47 v2(4557.32,3778.15) ; v1(4811.02,3700.79) 4846.46,3700.79 R5.1@4866.14,3720.47
  Bottom Layer w6: v2(4557.32,3778.15) 4634.69,3700.79 v1(4811.02,3700.79)
SW1: L1.1 U3.5 | length 65
  Top Layer w20: U3.5@3100.39,4129.92 L1.1@3100.39,4194.88
SW2: L2.1 U4.5 | length 72.8
  Top Layer w20: U4.5@3387.8,4129.92 L2.1@3387.8,4202.76
TCK: P1.1 R3.1 U1.H3 | length 739.4
  Top Layer w6: P1.1@3956.69,4015.75 P1.1@3960.63,4019.68 v1(4102.36,4019.68) ; U1.H3@4458.9,3797.84 v2(4478.58,3817.52)
  Bottom Layer w6: R3.1@3960.63,3956.69 P1.1@3960.63,4019.68 ; v1(4102.36,4019.68) 4156.91,3965.13 4401.57,3965.13 4455.53,3911.17 4455.53,3898.8 4456.69,3897.64 4456.69,3839.41 v2(4478.58,3817.52)
TDI: P1.9 R1.1 U1.H4 | length 1154.2
  Top Layer w6: P1.9@3960.63,4419.69 R1.1@4061.42,4419.69 ; U1.H4@4458.9,3758.47 v2(4478.58,3778.15)
  Bottom Layer w6: P1.9@3960.63,4419.69 4066.93,4313.39 4066.93,3993.54 4107.33,3953.13 4396.59,3953.13 4443.53,3906.2 4443.53,3813.21 v2(4478.58,3778.15)
TDO: P1.3 U1.J4 | length 738.8
  Top Layer w6: v2(4399.84,3778.15) U1.J4@4419.53,3758.47
  Bottom Layer w6: P1.3@3960.63,4119.69 4035.43,4044.88 4035.43,3988.19 4094.49,3929.13 4386.65,3929.13 4419.53,3896.26 4419.53,3797.83 v2(4399.84,3778.15)
TMS: P1.5 R2.1 U1.J5 | length 987.9
  Top Layer w6: P1.5@3960.63,4219.69 R2.1@4062.2,4219.69 ; v2(4399.84,3738.78) U1.J5@4419.53,3719.1
  Bottom Layer w6: P1.5@3960.63,4219.69 4051.18,4129.13 4051.18,3992.32 4102.36,3941.13 4391.62,3941.13 4431.53,3901.23 4431.53,3770.47 v2(4399.84,3738.78)
WR: Q3.54 U10.23 | length 519.1
  Top Layer w6: Q3.54@3303.7,2175 3303.7,2303.7 3334.65,2334.65 3422.48,2334.65 3501.22,2413.39 3551.18,2413.39 3577.5,2439.7 U10.23@3577.5,2499.96
pads on no net: C3.0 C4.0 C5.0 C10.0 C11.0 C12.0 C13.0 C22.0 C23.0 C24.0 C25.0 C32.0 L1.0 L2.0 LED1.0 P1.7 P1.8 Q1.0 Q3.18 R1.0 R2.0 R3.0 R4.0 R5.0 R7.0 R8.0 R9.0 R10.0 U1.A2 U1.A3 U1.A4 U1.A6 U1.A7 U1.A8 U1.A9 U1.A10 U1.A11 U1.B1 U1.B3 U1.B4 U1.B5 U1.B6 U1.B8 U1.B9 U1.B10 U1.B11 U1.B12 U1.B13 U1.C2 U1.C3 U1.C8 U1.C9 U1.D1 U1.D3 U1.D4 U1.D5 U1.D6 U1.D8 U1.D9 U1.E5 U1.E9 U1.F1 U1.F2 U1.F5 U1.F6 U1.F7 U1.F9 U1.F11 U1.F16 U1.G1 U1.G2 U1.G5 U1.J1 U1.J2 U1.J6 U1.K1 U1.K2 U1.K6 U1.K9 U1.K10 U1.L6 U1.L7 U1.L9 U1.L10 U1.L11 U1.M9 U1.N5 U1.N9 U1.N13 U1.P9 U1.T4 U2.0 U3.0 U4.0 U5.0 U7.36 U7.40 U10.2 U10.3 U10.5 U10.6 U10.8 U10.9 U10.11

## Polygon pours and split planes (outlines as drawn)
GND on Top Layer "Top Layer-No Net" (solid, remove dead copper, pour order 80): 2811.02,4524.78 2822.83,4535.43 5149.61,4535.43 5149.61,2297.29 5169.29,2279.53 5161.42,2286.63 2811.02,2286.63
GND on Top Layer "Top Layer-No Net" (solid, pour order 74): 5047.24,2413.39 5047.24,2275.59 5145.67,2275.59 5145.67,2413.39
3V3 on Top Layer "Top Layer-No Net" (solid, pour order 68): 3153.54,4291.34 3188.98,4291.34 3188.98,4114.17 3153.54,4114.17
1V2 on Top Layer "Top Layer-No Net" (solid, pour order 66): 3444.88,4129.92 3444.88,4271.65 3484.25,4271.65 3484.25,4125.98 3448.82,4125.98 3444.88,4129.92
5V on Top Layer "Top Layer-No Net" (solid, pour order 46): 2834.65,2417.32 2960.63,2417.32 2960.63,2283.46 2834.65,2283.46
2V5 on Top Layer "Top Layer-No Net" (solid, pour order 40): 3498.77,4303.47 3502.71,4299.54 3632.63,4299.54 3632.63,4149.93 3498.77,4149.93
GND on Top Layer "Top Layer-No Net" (solid, pour order 38): 3498.77,4311.35 3731.05,4311.35 3731.05,4142.06 3640.5,4142.06 3640.5,3913.71 3774.36,3913.71 3770.42,3917.65 3770.42,4401.9 3498.77,4401.9
3V3 on Top Layer "Top Layer-No Net" (solid, pour order 28): 3636.56,4134.18 3636.56,3913.71 3494.83,3913.71 3498.77,3917.65 3498.77,4134.18
1V2 on Top Layer "Top Layer-No Net" (solid, pour order 24): 3216.54,4362.2 3480.32,4362.2 3480.32,4251.97 3322.83,4251.97 3318.9,4248.03 3318.9,4173.23 3220.47,4173.23
GND on Top Layer "Top Layer-No Net" (solid, pour order 20): 2913.39,4165.35 3023.62,4165.35 3023.62,4098.43 3216.54,4098.43 3216.54,4169.29 3220.47,4173.23 3334.65,4173.23 3334.65,4094.49 3444.88,4094.49 3444.88,3992.13 3429.13,4007.87 2913.39,4007.87
5V on Top Layer "Top Layer-No Net" (solid, pour order 18): 2913.39,4035.43 3074.8,4035.43 3074.8,4074.8 3118.11,4074.8 3118.11,3996.06 3157.48,3996.06 3157.48,4074.8 3255.91,4074.8 3259.84,4070.87 3259.84,4023.62 3350.39,4023.62 3346.46,4027.56 3346.46,4078.74 3405.51,4078.74 3405.51,3933.07 2917.32,3933.07 2913.39,3937.01
3V3 on Top Layer "Top Layer-No Net" (solid, pour order 12): 2913.39,4240.16 2913.39,4169.29 3023.62,4169.29 3023.62,4255.91 3019.69,4259.84 3165.35,4259.84 3165.35,4362.2 2913.39,4362.2
GND on Bottom Layer "Top Layer-No Net" (solid, remove dead copper, pour order 82): 5177.17,4555.12 5173.23,4551.61 2803.15,4551.61 2803.15,2291.34 2807.09,2294.84 5181.1,2294.84
GND on Bottom Layer "Top Layer-No Net" (solid, pour order 76): 5145.67,2275.59 5047.24,2275.59 5047.24,2413.39 5145.67,2413.39
5V on Bottom Layer "Top Layer-No Net" (solid, pour order 44): 2834.65,2283.46 2960.63,2283.46 2960.63,2527.56 2834.65,2527.56
5V on MidLayer1 "Top Layer-No Net" (solid, remove dead copper, pour order 84): 2822.24,4124.6 2824.14,4122.7 3288.06,4122.7 3288.06,3904.86 3295.93,3896.98 3284.12,3885.17 2992.78,3885.17 2992.78,2683.79 2990.75,2681.76 2992.65,2683.66 5148.23,2683.66 5148.23,2052.56 5173.23,2027.56 5163.39,2037.4 2811.02,2037.4
3V3 on MidLayer1 "Top Layer-No Net" (solid, remove dead copper, pour order 72): 2826.77,4511.81 2822.24,4507.28 2822.24,4118.11 3283.46,4118.11 3291.34,4110.24 3291.34,3901.57 3007.87,3901.57 3000,3893.7 2984.25,3877.95 2984.25,2669.29 5133.86,2669.29 5141.73,2677.17 5173.23,2708.66 5173.23,4535.43
1V2 on MidLayer1 "Top Layer-No Net" (solid, pour order 78): 4834.65,3499.27 4834.65,3405.51 4831.88,3408.8 4642.5,3408.8 4642.5,3502.56
1V2 on MidLayer1 "Top Layer-No Net" (solid, pour order 64): 4222.68,3797.83 4655.75,3797.83 4655.75,3364.76 4222.68,3364.76
1V2 on MidLayer1 "Top Layer-No Net" (solid, pour order 60): 3196.85,4366.14 3196.85,4255.91 4456.69,4255.91 4460.63,4251.97 4439.21,4230.55 4439.21,3423.82 4655.75,3423.82 4629.92,3449.65 4629.92,4350.39
GND on Internal Plane 1 (split plane): 5153.13,2047.66 2831.12,2047.66 2831.12,4515.34 5153.13,4515.34

## Keep-outs
Keep-Out Layer:
  lines w10: 2811.02,2027.56 5173.23,2027.56 5173.23,4535.43 2811.02,4535.43 2811.02,2047.24 2811.02,2027.56

## Other copper
Top Layer:
  pour cut-out: 4106.3,3913.39 4771.65,3913.39 4770.45,3912.18 4770.45,3244.95 4106.28,3244.95 4104.57,3246.65
  pour cut-out: 3318.9,4248.03 3435.83,4248.03 3438.39,4245.47 3437.01,4244.09 3437.01,4098.43 3322.83,4098.43
  pour cut-out: 3023.62,4255.91 3027.56,4259.84 3153.54,4259.84 3153.54,4094.49 3149.61,4098.43 3023.62,4098.43

## Silkscreen, mask and mechanical layers (free items; w line width, h text height)
Bottom Overlay:
  text "SNES flash cart" at 3720.47,4314.96 h60
  text "Rev 1.0" at 3720.47,4208.66 h60
  text "aiju.de" at 3728.35,4110.24 h60
  text "FRONT" at 3578.74,3645.67 h60
  text "TOWARD ENEMY" at 3771.65,3543.31 h60

## Text inside footprints (layer, text, board x,y; h text height)
P1: Top Overlay "1" at 3980.63,3939.68 h50 r90; Top Overlay "2" at 3880.63,3919.68 h50 r90